# Altium PCB DriverMoteur2.1.PCBDOC
Units mm, origin at the board's own origin, x right, y up, seen from the top; angles counter-clockwise.
Board outline 299.72 x 199.9 mm, 2 copper layers (Top Layer, Bottom Layer); 14 components, 13 nets, 58 pads, 25 vias.
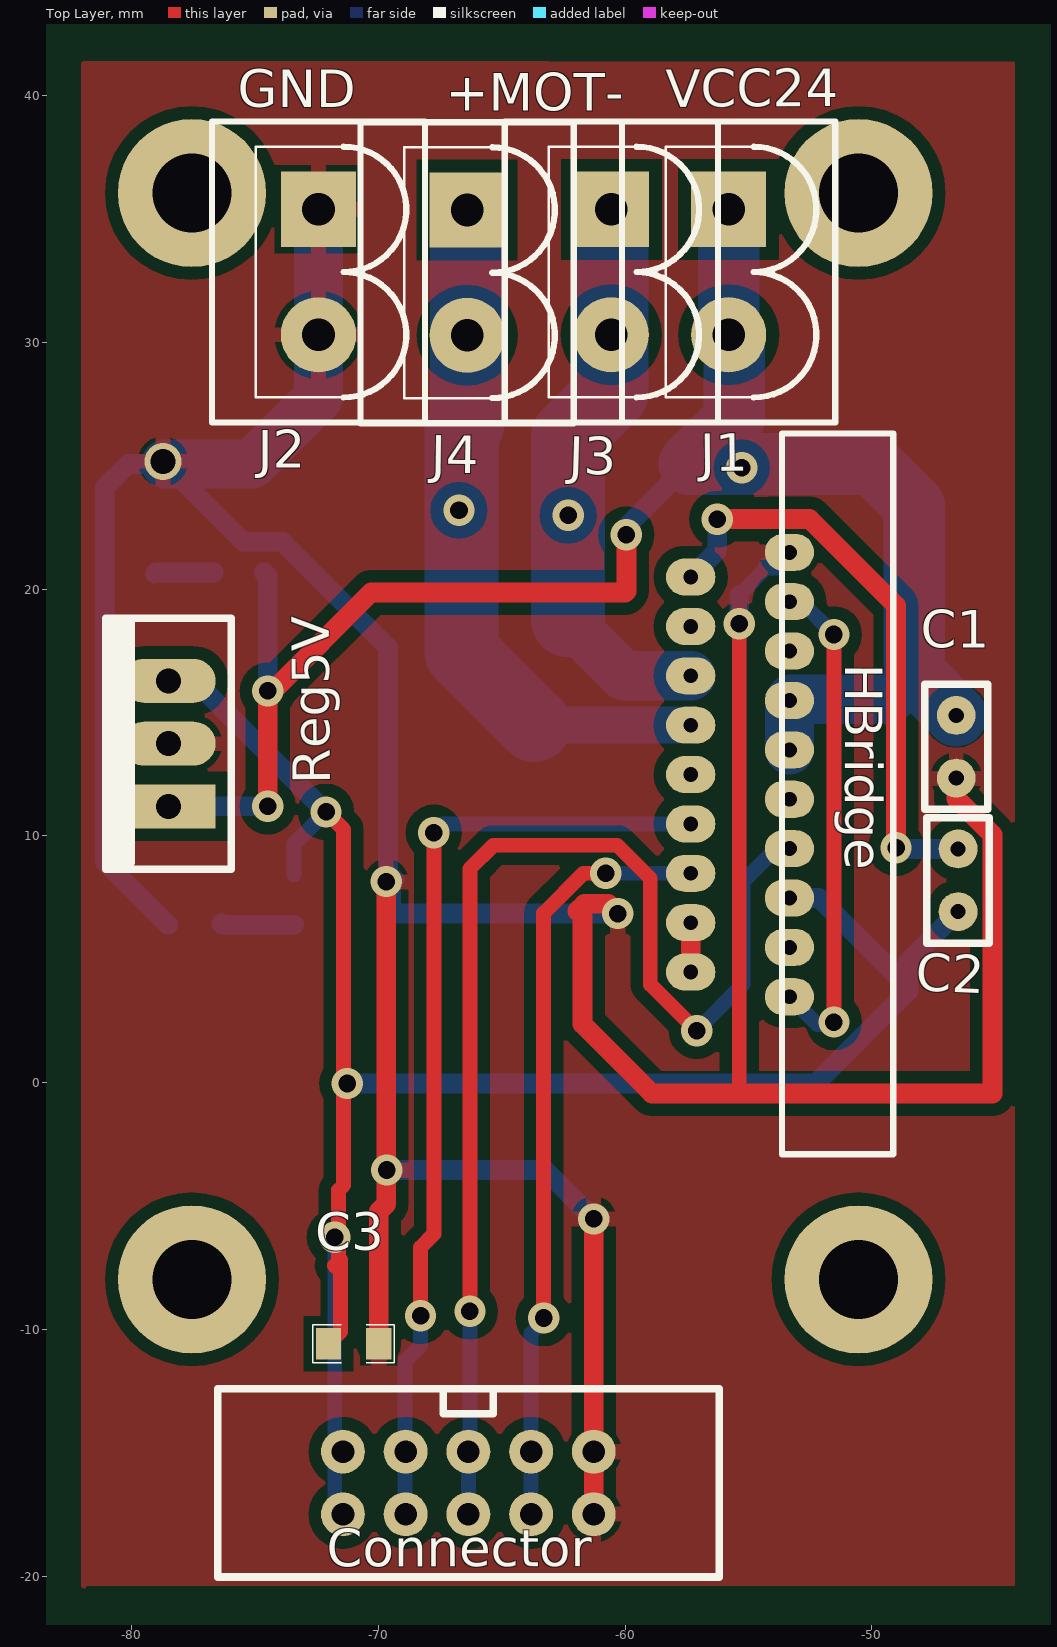
[diagram p0: Top Layer view]
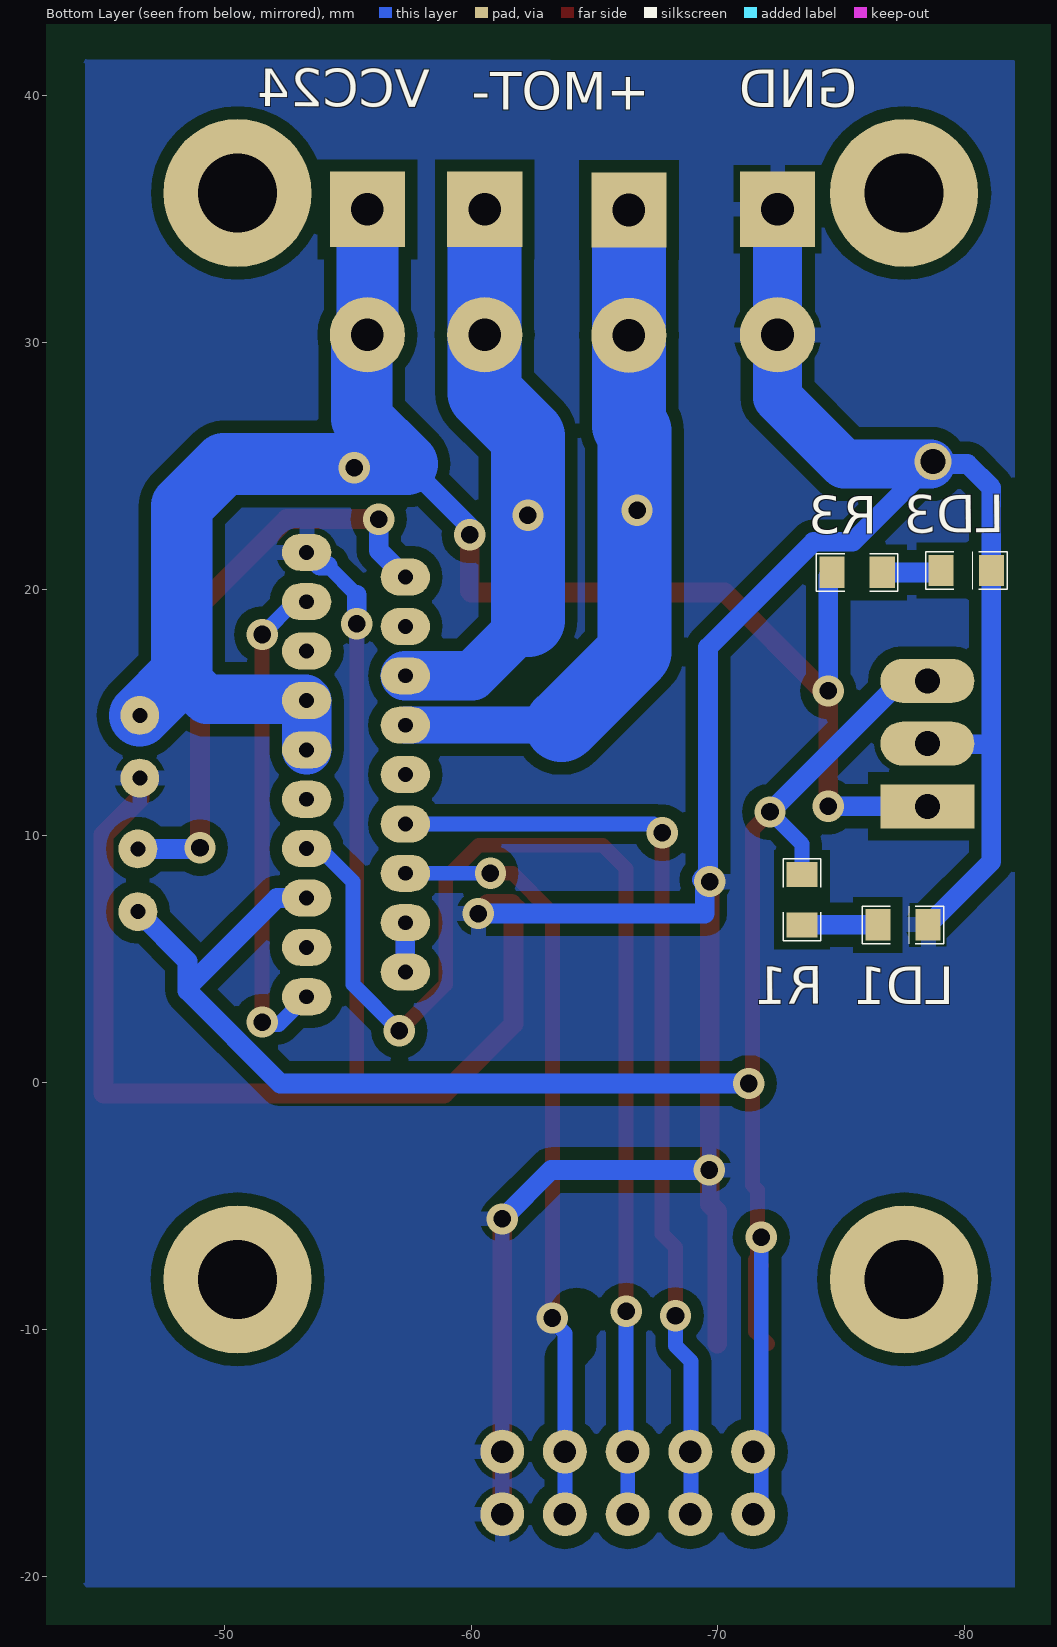
[diagram p1: Bottom Layer view, seen from below]

## Layer stack, top to bottom
Top Solder: solder mask 0.0102, Solder Resist, Dk 3.5
Top Layer: signal copper 0.0356
Dielectric1: dielectric 0.32, FR-4, Dk 4.8
Bottom Layer: signal copper 0.0356
Bottom Solder: solder mask 0.0102, Solder Resist, Dk 3.5

## Board outline
-141.655,-46.39 158.065,-46.39 158.065,153.508 -141.655,153.508

## Design rules (kind name [scope] priority, off if disabled: settings)
Clearance Clearance_bottom_polygon [OnLayer('Bottom Layer') Or OnLayer('Multi-Layer') vs OnLayer('Bottom Layer')  And  InPoly] p1: gap=0.508
Clearance Clearance_top_polygon [OnLayer('Top Layer')  Or OnLayer('Multi-Layer') vs OnLayer('Top Layer') And InPoly] p2: gap=0.508
Clearance Clearance_bottom [OnLayer('Bottom Layer') Or OnLayer('Multi-Layer') vs OnLayer('Bottom Layer')  And Not InPoly] p3: gap=0.203
Clearance Clearance_top [OnLayer('Top Layer')  Or OnLayer('Multi-Layer') vs OnLayer('Top Layer') And Not InPoly] p4: gap=0.203
Clearance Clearance_pad_to_pad [OnLayer('Multi-Layer') vs OnLayer('Multi-Layer')] p5: gap=0.254
ComponentClearance ComponentClearance_bottom [OnLayer('Bottom Overlay') vs OnLayer('Bottom Overlay')] p1: gap=0 collisioncheckmode=3 verticalgap=0.254 showdistances=FALSE
ComponentClearance ComponentClearance_top [OnLayer('Top Overlay') vs OnLayer('Top Overlay')] p2: gap=0 collisioncheckmode=3 verticalgap=0.254 showdistances=FALSE
FabricationTestPointUsage TestPointUsage [All] p1: valid=0 allowmultiple=FALSE
FabricationTestpoint Testpoint [All] p1: side=3 testpointundercomponent=TRUE minsize=1.016 maxsize=2.54 preferedsize=1.524 minholesize=0 maxholesize=1.016 preferedholesize=0.813 testpointgrid=0.025 allowsidetop=TRUE allowsidebottom=TRUE usegrid=TRUE gridtolerance=0
HoleSize [All] p1: absolutevalues=TRUE maxlimit=25.4 minlimit=0.406 maxpercent=80.000 minpercent=20.000
MinimumAnnularRing [PadXSize_AllLayers = PadYSize_AllLayers] p1: minimumring=0.254
PermittedLayers [All] p1: toplayerpermitted=TRUE bottomlayerpermitted=TRUE
PolygonConnect [All] p1: connectstyle=Relief reliefconductorwidth=0.61 reliefentries=4 polygonreliefangle="90 Angle" airgapwidth=0.254
RoomDefinition SchemaDriverMoteur [InComponentClass('SchemaDriverMoteur')] p1: confinementstyle=ConfineIn formatcopy=TRUE lockcomponents=FALSE outline -192.455,-122.59 -141.655,-122.59 -141.655,-97.19 -192.455,-97.19
RoutingVias [All] p1: holewidth=0.406 width=0.813 viastyle="Through Hole" minholewidth=0.4 minwidth=0.8 maxholewidth=0.6 maxwidth=10
SMDToPlane [All] p1: distance=0
SolderMaskExpansion [All] p1: expansion=0.102
ViasUnderSMD [All] p1: allowed=FALSE
Width Width_botom_top [OnLayer('Bottom Layer') or OnLayer('Top Layer')] p1: maxlimit=254 minlimit=0.254 preferedwidth=0.813 minimp=50.000000 maximp=50.000000 favimp=50.000000
26 further rules are at their usual default settings.

## Components (designator, comment, footprint, x,y, rotation, side; value= is the part's Value field where it differs from the comment)
C1 "CAP" RAD0.1 -46.584,14.884 r270 top
C2 "CAP" RAD0.1 -46.507,9.474 r270 top
C3 "CAP" 0805 -72.009,-10.566 r0 top
Connector "comment" HE10-10V -61.265,-14.935 r270 top (schematic designator J5)
HBridge "STK681_320" stk681_320 -53.34,21.488 r270 top (schematic designator D1)
J1 "comment" AMP_2 -55.804,35.382 r270 top
J2 "comment" AMP_2 -72.415,35.382 r270 top
J3 "comment" AMP_2 -60.554,35.382 r270 top
J4 "comment" AMP_2 -66.396,35.357 r270 top
LD1 "comment" LED0805 -78.511,6.401 r0 bottom
LD3 "comment" LED0805 -81.077,20.752 r0 bottom
R1 "RES" 0805 -73.406,6.401 r90 bottom
R3 "RES" 0805 -76.657,20.676 r0 bottom
Reg5V "LM317" TO220V -78.486,11.201 r90 top (schematic designator U1)

## Footprints (in the part's own frame and the unit in brackets; to place one, negate y for a bottom-side part, rotate by r counter-clockwise, add the part's x,y. Pads: shape width x height; smd on the part's side, far side on the other; paste and mask are expansions set on the pad)
0805 [mil]
  rect 40x50 smd: 1(0,0) 2(80,0)
  silkscreen extent -25,-30 105,30
AMP_2 [mil]
  rect 120x120 hole 52: 1(0,0)
  round 120 hole 52: 2(200,0)
  silkscreen extent -140,-170 340,170
HE10-10V [mil]
  round 70 hole 36: 1(0,0) 2(100,0) 3(0,-100) 4(100,-100) 5(0,-200) 6(100,-200) 7(0,-300) 8(100,-300) 9(0,-400) 10(100,-400)
  silkscreen extent -100,-600 200,200
LED0805 [mil]
  rect 40x50 smd: A(80,0) K(0,0)
  silkscreen extent -25,-30 105,30
RAD0.1 [mil]
  round 62 hole 24: 1(0,0) 2(100,0)
  silkscreen extent -50,-50 150,50
stk681_320 [mm]
  oval 1.5x2 hole 0.6: 1(0,0) 2(1,-4) 3(2,0) 4(3,-4) 5(4,0) 6(5,-4) 7(6,0) 8(7,-4) 9(8,0) 10(9,-4) 11(10,0) 12(11,-4) 13(12,0) 14(13,-4) 15(14,0) 16(15,-4) 17(16,0) 18(17,-4) 19(18,0)
  silkscreen extent -4.82,-0.3 24.38,4.2
TO220V [mil]
  rect 70x150 hole 40: 1(0,0)
  oval 70x150 hole 40: 2(100,0) 3(200,0)
  silkscreen extent -100,-100 300,100

## Part data
C1 C2 C3: "capacité non polarisée"
Connector: library part HE10-10, "10-pin connector"
J1 J2 J3 J4: library part POWER2, "connecteur alim 2 pôles"
LD1 LD3: library part LED, "LED 5mm/3mm/CMS"
R1 R3: "resistance"
Reg5V: library part REG_ADJ_POS, "régulateur positif ajustable"

## Free pads (board coordinates)
  round 6 hole 3.2: ""(-77.544,-7.959) ""(-77.544,36.041) ""(-50.544,-7.959) ""(-50.544,36.041)

## Via types
v1: diameter 1.27, hole 0.711, Top Layer to Bottom Layer, 24 vias
v2: diameter 1.5, hole 1, Top Layer to Bottom Layer, 1 vias

## Nets (pads, with @x,y where several pads share a name; then routed paths per layer and width w, separated by ;. In a path a pad name is that pad's centre, name@x,y a point inside that pad or via, vN(x,y) a via of type N, cw(c..) or ccw(c..) an arc to the next point about the centre after c; other vN are vias at no path point)
GND: C1.2 C3.2 Connector.1 Connector.2 HBridge.1 J2.1 J2.2 LD1.K LD3.K Reg5V.2 | length 172
  Top Layer w0.6: -55.372,-0.432 v1(-55.372,18.593)
  Top Layer w0.8: C3.2 -69.977,-5.214 -69.672,-4.91 v1(-69.672,8.153) ; Connector.2 Connector.1 v1(-61.265,-5.512) ; v1(-60.3,6.858) -60.692,7.25 -61.644,7.25 -61.935,6.96 -61.722,6.96 -61.722,2.388 -58.903,-0.432 -55.372,-0.432 -45.117,-0.432 -45.117,10.05 -46.584,11.517 C1.2
  Bottom Layer w0.6: -55.372,19.762 -54.192,20.942
  Bottom Layer w0.8: v2(-78.715,25.171) v2@-78.613,25.07 ; LD1.K -81.077,8.966 -81.077,13.716 ; Reg5V.2 -78.511,13.716 -81.077,13.716 ; v1(-69.647,-3.531) -63.246,-3.531 v1(-61.265,-5.512) ; v1@-69.469,8.357 -69.469,6.858 v1(-60.3,6.858) ; v1@-69.342,8.23 -69.596,8.484 -69.596,17.642 -73.867,21.914 -75.457,21.914 v2@-78.613,25.07 ; v1@-55.372,18.948 -55.372,19.762 ; -54.192,20.942 -53.887,20.942 HBridge.1 ; -81.077,13.716 LD3.K -81.077,24.105 -80.112,25.07 v2@-78.613,25.07
  Bottom Layer w2: v2@-78.613,25.07 -75.108,25.07 -72.415,27.762 J2.2 J2.1
NetC2_1: C2.1 HBridge.2 | length 23.6
  Top Layer w0.8: v1(-56.261,22.835) -54.158,22.835 -54.151,22.842 -52.529,22.842 -49.022,19.334 v1(-49.022,9.525)
  Bottom Layer w0.8: HBridge.2 -56.261,21.567 v1(-56.261,22.835) ; v1@-48.793,9.5 -48.768,9.474 C2.1
NetHBridge_16: HBridge.16 HBridge.18 | length 4
  Top Layer w0.8: HBridge.18 HBridge.16
  Bottom Layer w0.8: HBridge.18 HBridge.16
NetLD1_A: LD1.A R1.1 | length 3
  Bottom Layer w0.8: LD1.A@-76.352,6.452 -76.302,6.401 R1.1
NetLD3_A: LD3.A R3.1 | length 2.4
  Bottom Layer w0.8: LD3.A@-79.045,20.625 -78.994,20.676 R3.1
OUTMOTOR1: HBridge.8 J4.1 J4.2 | length 28.5
  Bottom Layer w1.5: -63.667,14.488 HBridge.8
  Bottom Layer w3: J4.1 J4.2 -66.396,26.628 -66.627,26.397 -66.627,17.448 -63.667,14.488
  other v1: -66.726,23.19
OUTMOTOR2: HBridge.6 J3.1 J3.2 | length 23.3
  Bottom Layer w2: -62.306,18.749 -60.046,16.488 HBridge.6
  Bottom Layer w3: -62.306,18.749 -62.306,26.187 -60.554,27.94 J3.2 J3.1
  other v1: -62.306,22.987
PWM: Connector.3 Connector.4 HBridge.14 | length 31.2
  Top Layer w0.6: v1(-63.297,-9.525) -63.297,6.875 -61.684,8.488 v1(-60.787,8.488)
  Bottom Layer w0.6: Connector.4 Connector.3 -63.805,-10.146 -63.297,-9.638 v1(-63.297,-9.525) ; v1(-60.787,8.488) HBridge.14
RSO: HBridge.3 HBridge.19 | length 20.3
  Top Layer w0.6: v1(-51.537,2.464) v1(-51.537,18.161)
  Bottom Layer w0.6: HBridge.19 -52.214,2.362 v1@-51.537,2.362 ; HBridge.3 -52.864,19.488 v1(-51.537,18.161)
SIGNAL1: Connector.7 Connector.8 HBridge.12 | length 38.7
  Top Layer w0.6: v1(-68.282,-9.43) -68.282,-6.661 -67.742,-6.121 v1(-67.742,10.135)
  Bottom Layer w0.6: Connector.8 -68.91,-17.45 -68.91,-11.278 -68.282,-10.649 v1(-68.282,-9.43) ; v1(-67.742,10.135) -67.388,10.488 HBridge.12
SIGNAL2: Connector.5 Connector.6 HBridge.13 | length 50.6
  Top Layer w0.6: v1(-66.282,-9.258) -66.282,8.674 -65.329,9.627 -60.316,9.627 -58.979,8.29 -58.979,3.988 v1(-57.099,2.108)
  Bottom Layer w0.6: Connector.6 Connector.5 -66.282,-14.872 v1(-66.282,-9.258) ; v1(-57.099,2.108) -55.22,3.988 -55.22,8.153 -53.885,9.488 HBridge.13
VCC5: C2.2 C3.1 Connector.9 Connector.10 HBridge.15 R1.2 Reg5V.3 | length 80.8
  Top Layer w0.6: v1(-72.111,10.973) -71.399,10.262 -71.399,-4.14 -71.603,-4.343 -71.603,-7.569 -71.768,-7.404 -71.526,-7.163 -71.526,-10.084 C3.1
  Bottom Layer w0.6: Reg5V.3 Reg5V.3@-77.419,16.281 ; R1.2 -73.406,9.677 v1(-72.111,10.973) ; v1(-71.755,-6.248) -71.755,-17.145 Connector.10
  Bottom Layer w0.8: Reg5V.3@-77.419,16.281 v1(-72.111,10.973) ; v1(-71.247,-0.025) -52.275,-0.025 -48.514,3.735 -48.514,3.861 ; HBridge.15 -52.142,7.488 -48.514,3.861 ; C2.2 -48.514,4.928 -48.514,3.861
VCC24: C1.1 HBridge.7 HBridge.9 J1.1 J1.2 R3.2 Reg5V.1 | length 73.4
  Top Layer w0.8: v1(-74.473,11.201) v1(-74.473,15.875) ; v1@-74.27,15.875 -70.282,19.863 -59.995,19.863 ; -59.944,19.914 v1(-59.944,22.2)
  Bottom Layer w0.8: Reg5V.1 v1(-74.473,11.201) ; R3.2 -74.473,20.523 v1(-74.473,15.875) ; v1(-59.944,22.2) -59.944,22.53 -57.404,25.07
  Bottom Layer w2: HBridge.9 HBridge.7 -53.293,15.535 -49.286,15.535 -48.285,16.535
  Bottom Layer w2.5: J1.1 J1.2 -55.575,30.074 -55.575,26.899 -57.404,25.07 -49.987,25.07 -48.285,23.368 -48.285,16.535 -48.235,16.535 C1.1
  other v1: -55.27,24.917
pads on no net: HBridge.4 HBridge.5 HBridge.10 HBridge.11 HBridge.17

## Polygon pours and split planes (outlines as drawn)
GND on Bottom Layer "Bottom Layer-gnd" (solid, pour order 2): -82.067,41.427 -82.017,41.377 -82.017,-20.422 -44.425,-20.422 -44.298,-20.295 -44.374,-20.218 -44.374,41.275 -44.221,41.427 -44.247,41.453 -44.425,41.453
GND on Top Layer "top Layer-gnd" (solid, pour order 4): -82.017,41.402 -82.017,-20.599 -82.042,-20.625 -81.788,-20.371 -44.221,-20.371 -44.221,41.3 -44.171,41.351

## Silkscreen, mask and mechanical layers (free items; w line width, h text height)
Top Overlay:
  text "GND" at -75.692,39.522 h1.52
  text "VCC24" at -58.344,39.522 h1.52 r0.35
  text "+MOT-" at -67.259,39.37 h1.52
Bottom Overlay:
  text "GND" at -75.641,39.522 h1.52
  text "VCC24" at -58.318,39.522 h1.52 r0.35
  text "+MOT-" at -67.234,39.421 h1.52
Mechanical 1:
  lines w0.1: -82.017,-20.371 -82.017,-19.431 -82.017,26.772 -82.017,40.335 -82.017,41.377 -81.966,41.427 -46.711,41.427 -44.247,41.427 -44.221,41.402 -44.221,37.617 -44.221,24.333 -44.221,12.789 -44.221,-19.406 -44.221,-20.193 -44.221,-20.32 -44.272,-20.371 -44.907,-20.371 -82.017,-20.371